# Altium PCB JtagProgCable.PcbDoc (part 2 of 2)
Units mil, origin at the board's own origin, x right, y up, seen from the top; angles counter-clockwise.
Board outline 2330 x 3440 mil, 4 copper layers (Top Layer, MidLayer1, VCC, Bottom Layer); 204 components, 19 nets, 965 pads, 156 vias.
Unrouted connection lines stored in the file: 209.
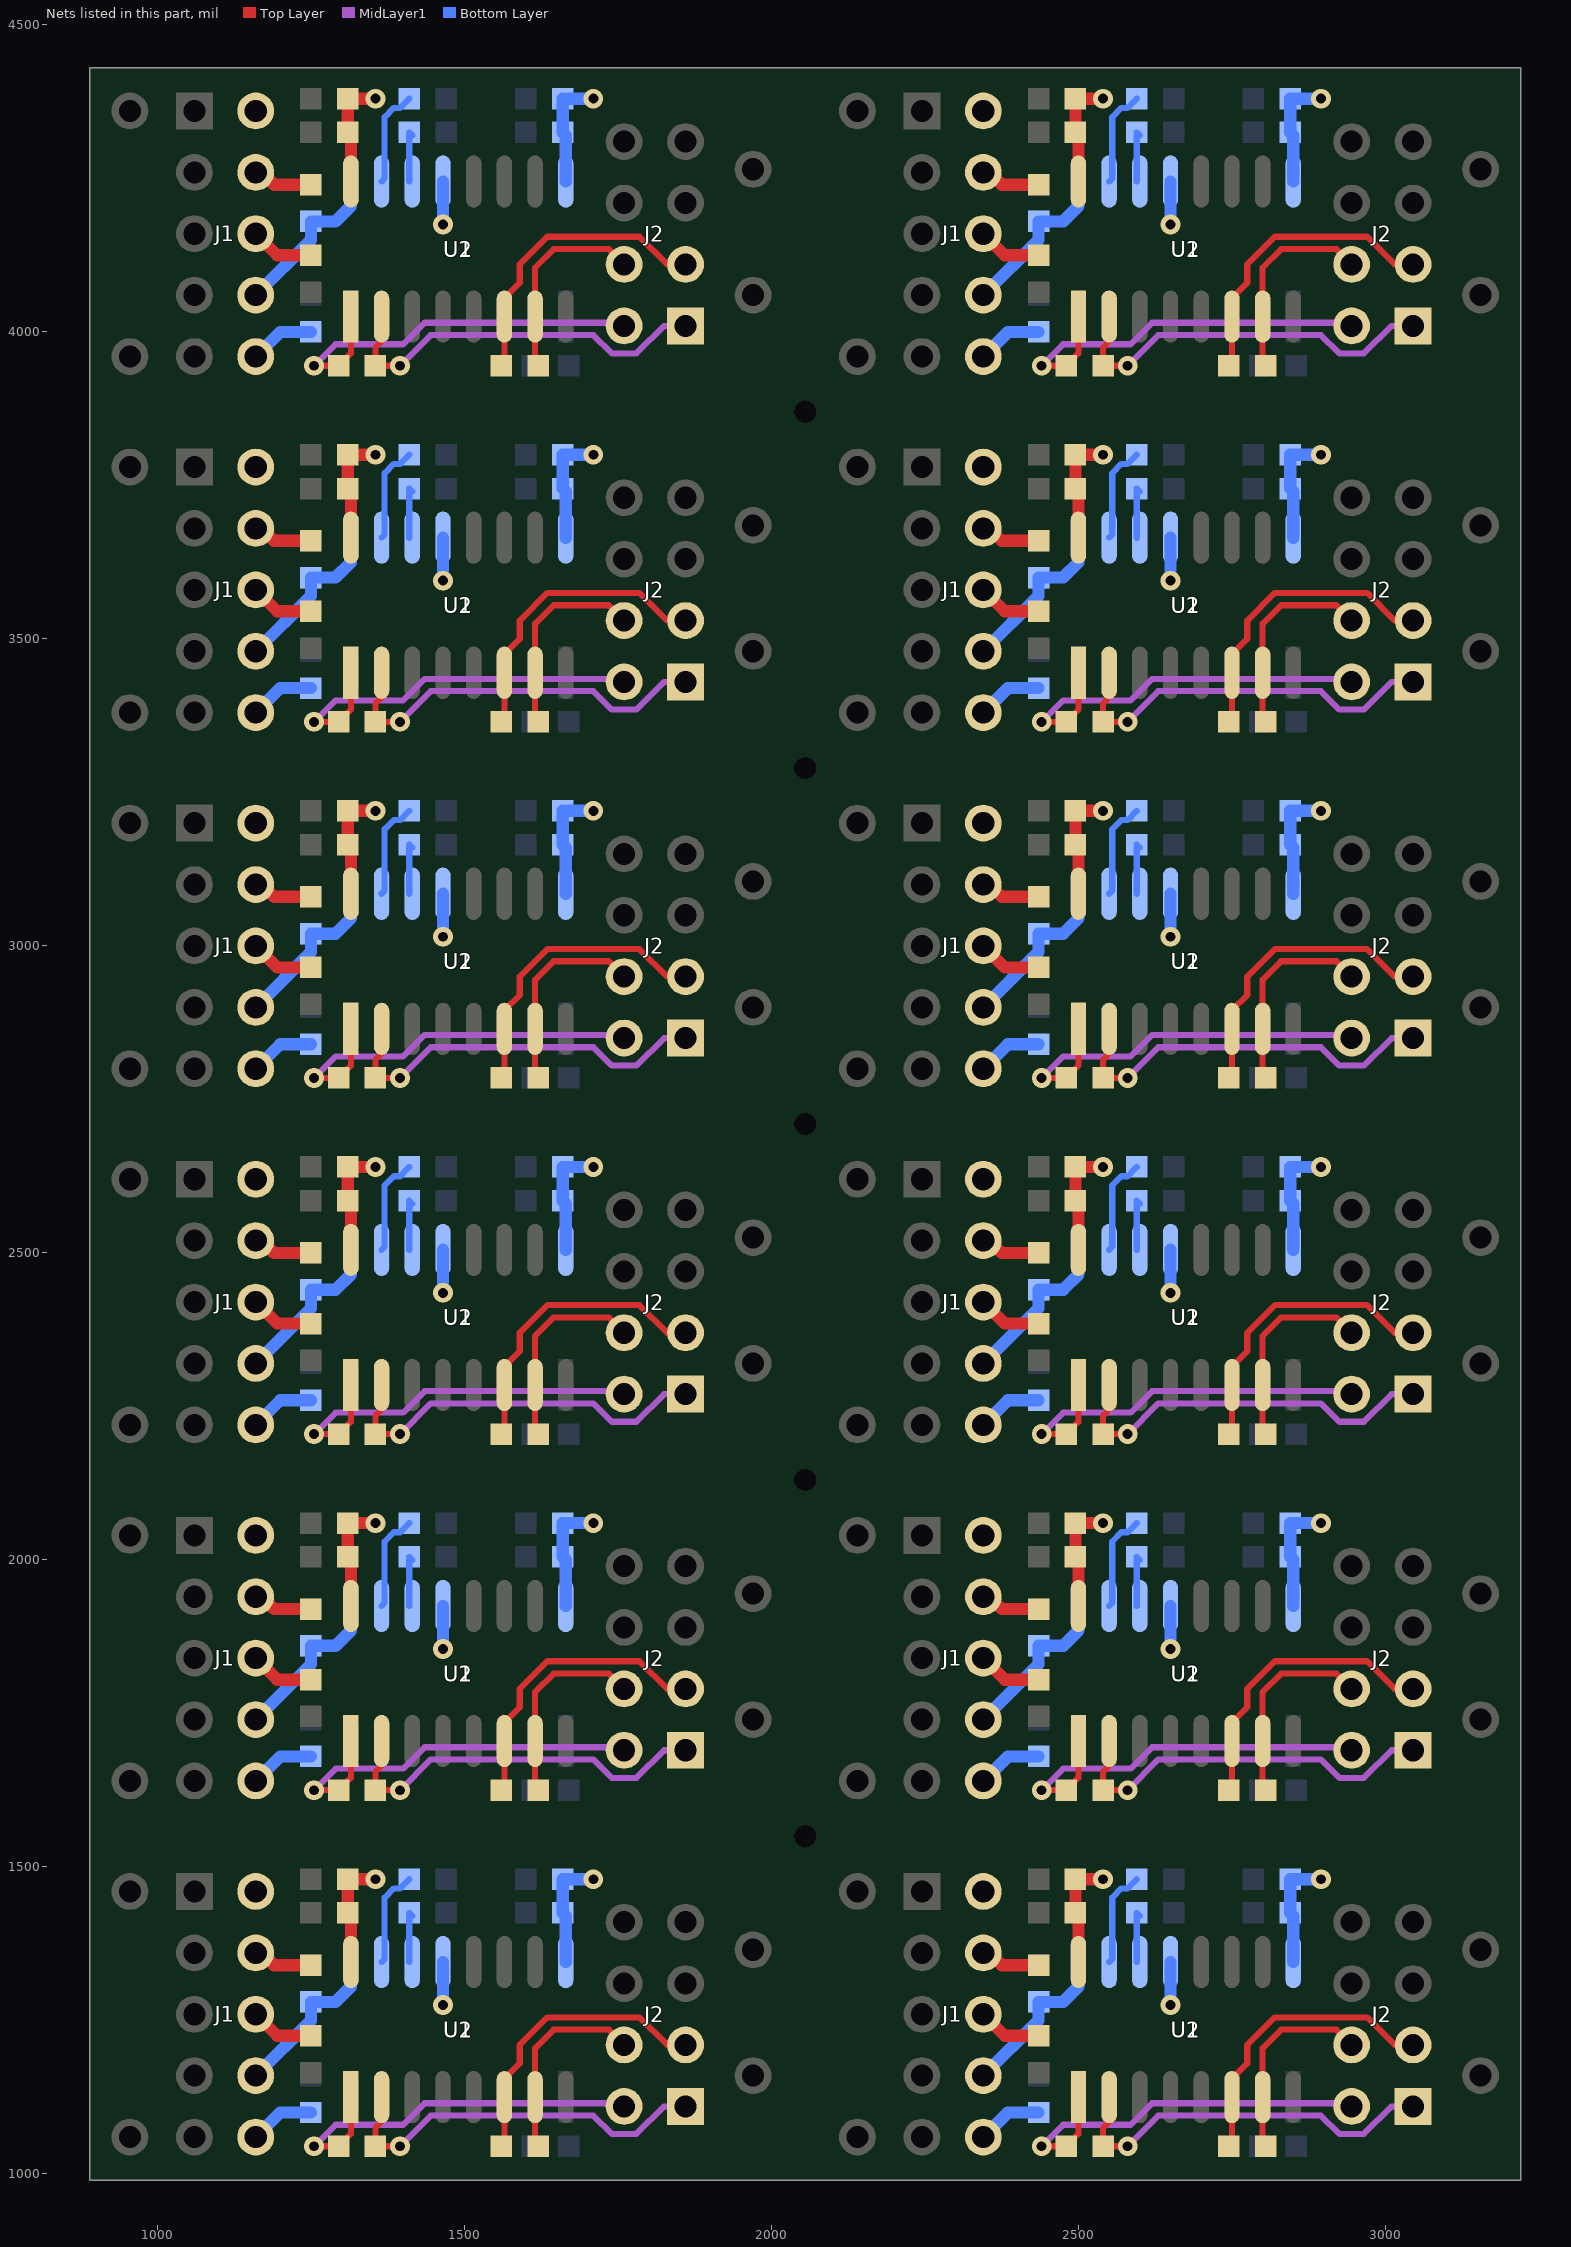
[diagram p4: the nets of this part, all layers, seen from the top]

## Via types
v1: diameter 32, hole 16, Top Layer to Bottom Layer, 156 vias

## Nets (pads, with @x,y where several pads share a name; then routed paths per layer and width w, separated by ;. In a path a pad name is that pad's centre, name@x,y a point inside that pad or via, vN(x,y) a via of type N, cw(c..) or ccw(c..) an arc to the next point about the centre after c; other vN are vias at no path point) (continued)
TDO+: R8.1 U2.10 | length 1914.3
  Bottom Layer w10: U2.10@1364.94,1345 1370,1350.06 1370,1450 1385,1465 1395,1465 R8.1@1410,1480 ; U2.10@1364.94,1925 1370,1930.06 1370,2030 1385,2045 1395,2045 R8.1@1410,2060 ; U2.10@1364.94,2505 1370,2510.06 1370,2610 1385,2625 1395,2625 R8.1@1410,2640 ; U2.10@1364.94,3085 1370,3090.06 1370,3190 1385,3205 1395,3205 R8.1@1410,3220 ; U2.10@1364.94,3665 1370,3670.06 1370,3770 1385,3785 1395,3785 R8.1@1410,3800 ; U2.10@1364.94,4245 1370,4250.06 1370,4350 1385,4365 1395,4365 R8.1@1410,4380 ; U2.10@2549.94,1345 2555,1350.06 2555,1450 2570,1465 2580,1465 R8.1@2595,1480 ; U2.10@2549.94,1925 2555,1930.06 2555,2030 2570,2045 2580,2045 R8.1@2595,2060 ; U2.10@2549.94,2505 2555,2510.06 2555,2610 2570,2625 2580,2625 R8.1@2595,2640 ; U2.10@2549.94,3085 2555,3090.06 2555,3190 2570,3205 2580,3205 R8.1@2595,3220 ; U2.10@2549.94,3665 2555,3670.06 2555,3770 2570,3785 2580,3785 R8.1@2595,3800 ; U2.10@2549.94,4245 2555,4250.06 2555,4350 2570,4365 2580,4365 R8.1@2595,4380
TDO-: R7.1 U2.11 | length 984.5
  Bottom Layer w10: U2.11@1410,1344.94 R7.1@1410,1420 ; R7.1@1410,1425 R7.1@1414.94,1420.06 ; U2.11@1410,1924.94 R7.1@1410,2000 ; R7.1@1410,2005 R7.1@1414.94,2000.06 ; U2.11@1410,2504.94 R7.1@1410,2580 ; R7.1@1410,2585 R7.1@1414.94,2580.06 ; U2.11@1410,3084.94 R7.1@1410,3160 ; R7.1@1410,3165 R7.1@1414.94,3160.06 ; U2.11@1410,3664.94 R7.1@1410,3740 ; R7.1@1410,3745 R7.1@1414.94,3740.06 ; U2.11@1410,4244.94 R7.1@1410,4320 ; R7.1@1410,4325 R7.1@1414.94,4320.06 ; U2.11@2595,1344.94 R7.1@2595,1420 ; R7.1@2595,1425 R7.1@2599.94,1420.06 ; U2.11@2595,1924.94 R7.1@2595,2000 ; R7.1@2595,2005 R7.1@2599.94,2000.06 ; U2.11@2595,2504.94 R7.1@2595,2580 ; R7.1@2595,2585 R7.1@2599.94,2580.06 ; U2.11@2595,3084.94 R7.1@2595,3160 ; R7.1@2595,3165 R7.1@2599.94,3160.06 ; U2.11@2595,3664.94 R7.1@2595,3740 ; R7.1@2595,3745 R7.1@2599.94,3740.06 ; U2.11@2595,4244.94 R7.1@2595,4320 ; R7.1@2595,4325 R7.1@2599.94,4320.06
TMS+: J2.3 R4.1 U1.6 | length 5816.5
  Top Layer w10: R4.1@1560,1045 1565,1050 U1.6@1565,1125 1565,1155 1590,1180 1590,1210 1635,1255 1785,1255 1830,1210 J2.3@1860,1210 ; R4.1@1560,1625 1565,1630 U1.6@1565,1705 1565,1735 1590,1760 1590,1790 1635,1835 1785,1835 1830,1790 J2.3@1860,1790 ; R4.1@1560,2205 1565,2210 U1.6@1565,2285 1565,2315 1590,2340 1590,2370 1635,2415 1785,2415 1830,2370 J2.3@1860,2370 ; R4.1@1560,2785 1565,2790 U1.6@1565,2865 1565,2895 1590,2920 1590,2950 1635,2995 1785,2995 1830,2950 J2.3@1860,2950 ; R4.1@1560,3365 1565,3370 U1.6@1565,3445 1565,3475 1590,3500 1590,3530 1635,3575 1785,3575 1830,3530 J2.3@1860,3530 ; R4.1@1560,3945 1565,3950 U1.6@1565,4025 1565,4055 1590,4080 1590,4110 1635,4155 1785,4155 1830,4110 J2.3@1860,4110 ; R4.1@2745,1045 2750,1050 U1.6@2750,1125 2750,1155 2775,1180 2775,1210 2820,1255 2970,1255 3015,1210 J2.3@3045,1210 ; R4.1@2745,1625 2750,1630 U1.6@2750,1705 2750,1735 2775,1760 2775,1790 2820,1835 2970,1835 3015,1790 J2.3@3045,1790 ; R4.1@2745,2205 2750,2210 U1.6@2750,2285 2750,2315 2775,2340 2775,2370 2820,2415 2970,2415 3015,2370 J2.3@3045,2370 ; R4.1@2745,2785 2750,2790 U1.6@2750,2865 2750,2895 2775,2920 2775,2950 2820,2995 2970,2995 3015,2950 J2.3@3045,2950 ; R4.1@2745,3365 2750,3370 U1.6@2750,3445 2750,3475 2775,3500 2775,3530 2820,3575 2970,3575 3015,3530 J2.3@3045,3530 ; R4.1@2745,3945 2750,3950 U1.6@2750,4025 2750,4055 2775,4080 2775,4110 2820,4155 2970,4155 3015,4110 J2.3@3045,4110
TMS-: J2.4 R4.2 U1.7 | length 3993.4
  Top Layer w10: R4.2@1620,1045 1615,1045 U1.7@1615,1125 1615,1205 1645,1235 1735,1235 J2.4@1760,1210 ; R4.2@1620,1625 1615,1625 U1.7@1615,1705 1615,1785 1645,1815 1735,1815 J2.4@1760,1790 ; R4.2@1620,2205 1615,2205 U1.7@1615,2285 1615,2365 1645,2395 1735,2395 J2.4@1760,2370 ; R4.2@1620,2785 1615,2785 U1.7@1615,2865 1615,2945 1645,2975 1735,2975 J2.4@1760,2950 ; R4.2@1620,3365 1615,3365 U1.7@1615,3445 1615,3525 1645,3555 1735,3555 J2.4@1760,3530 ; R4.2@1620,3945 1615,3945 U1.7@1615,4025 1615,4105 1645,4135 1735,4135 J2.4@1760,4110 ; R4.2@2805,1045 2800,1045 U1.7@2800,1125 2800,1205 2830,1235 2920,1235 J2.4@2945,1210 ; R4.2@2805,1625 2800,1625 U1.7@2800,1705 2800,1785 2830,1815 2920,1815 J2.4@2945,1790 ; R4.2@2805,2205 2800,2205 U1.7@2800,2285 2800,2365 2830,2395 2920,2395 J2.4@2945,2370 ; R4.2@2805,2785 2800,2785 U1.7@2800,2865 2800,2945 2830,2975 2920,2975 J2.4@2945,2950 ; R4.2@2805,3365 2800,3365 U1.7@2800,3445 2800,3525 2830,3555 2920,3555 J2.4@2945,3530 ; R4.2@2805,3945 2800,3945 U1.7@2800,4025 2800,4105 2830,4135 2920,4135 J2.4@2945,4110
TSK+: J2.1 R3.2 U1.2 | length 7691
  Top Layer w10: U1.2@1365,1125 1365,1085 1355,1075 R3.2@1355,1045 v1(1395,1045) ; U1.2@1365,1705 1365,1665 1355,1655 R3.2@1355,1625 v1(1395,1625) ; U1.2@1365,2285 1365,2245 1355,2235 R3.2@1355,2205 v1(1395,2205) ; U1.2@1365,2865 1365,2825 1355,2815 R3.2@1355,2785 v1(1395,2785) ; U1.2@1365,3445 1365,3405 1355,3395 R3.2@1355,3365 v1(1395,3365) ; U1.2@1365,4025 1365,3985 1355,3975 R3.2@1355,3945 v1(1395,3945) ; U1.2@2550,1125 2550,1085 2540,1075 R3.2@2540,1045 v1(2580,1045) ; U1.2@2550,1705 2550,1665 2540,1655 R3.2@2540,1625 v1(2580,1625) ; U1.2@2550,2285 2550,2245 2540,2235 R3.2@2540,2205 v1(2580,2205) ; U1.2@2550,2865 2550,2825 2540,2815 R3.2@2540,2785 v1(2580,2785) ; U1.2@2550,3445 2550,3405 2540,3395 R3.2@2540,3365 v1(2580,3365) ; U1.2@2550,4025 2550,3985 2540,3975 R3.2@2540,3945 v1(2580,3945)
  MidLayer1 w10: v1(1395,1045) 1445,1095 1710,1095 1740,1065 1780,1065 1825,1110 J2.1@1860,1110 ; v1(1395,1625) 1445,1675 1710,1675 1740,1645 1780,1645 1825,1690 J2.1@1860,1690 ; v1(1395,2205) 1445,2255 1710,2255 1740,2225 1780,2225 1825,2270 J2.1@1860,2270 ; v1(1395,2785) 1445,2835 1710,2835 1740,2805 1780,2805 1825,2850 J2.1@1860,2850 ; v1(1395,3365) 1445,3415 1710,3415 1740,3385 1780,3385 1825,3430 J2.1@1860,3430 ; v1(1395,3945) 1445,3995 1710,3995 1740,3965 1780,3965 1825,4010 J2.1@1860,4010 ; v1(2580,1045) 2630,1095 2895,1095 2925,1065 2965,1065 3010,1110 J2.1@3045,1110 ; v1(2580,1625) 2630,1675 2895,1675 2925,1645 2965,1645 3010,1690 J2.1@3045,1690 ; v1(2580,2205) 2630,2255 2895,2255 2925,2225 2965,2225 3010,2270 J2.1@3045,2270 ; v1(2580,2785) 2630,2835 2895,2835 2925,2805 2965,2805 3010,2850 J2.1@3045,2850 ; v1(2580,3365) 2630,3415 2895,3415 2925,3385 2965,3385 3010,3430 J2.1@3045,3430 ; v1(2580,3945) 2630,3995 2895,3995 2925,3965 2965,3965 3010,4010 J2.1@3045,4010
TSK-: J2.2 R3.1 U1.1 | length 7972.2
  Top Layer w10: v1(1255,1045) R3.1@1295,1045 1315,1065 U1.1@1315,1125 ; v1(1255,1625) R3.1@1295,1625 1315,1645 U1.1@1315,1705 ; v1(1255,2205) R3.1@1295,2205 1315,2225 U1.1@1315,2285 ; v1(1255,2785) R3.1@1295,2785 1315,2805 U1.1@1315,2865 ; v1(1255,3365) R3.1@1295,3365 1315,3385 U1.1@1315,3445 ; v1(1255,3945) R3.1@1295,3945 1315,3965 U1.1@1315,4025 ; v1(2440,1045) R3.1@2480,1045 2500,1065 U1.1@2500,1125 ; v1(2440,1625) R3.1@2480,1625 2500,1645 U1.1@2500,1705 ; v1(2440,2205) R3.1@2480,2205 2500,2225 U1.1@2500,2285 ; v1(2440,2785) R3.1@2480,2785 2500,2805 U1.1@2500,2865 ; v1(2440,3365) R3.1@2480,3365 2500,3385 U1.1@2500,3445 ; v1(2440,3945) R3.1@2480,3945 2500,3965 U1.1@2500,4025
  MidLayer1 w10: v1(1255,1045) 1290,1080 1400,1080 1435,1115 1755,1115 J2.2@1760,1110 ; v1(1255,1625) 1290,1660 1400,1660 1435,1695 1755,1695 J2.2@1760,1690 ; v1(1255,2205) 1290,2240 1400,2240 1435,2275 1755,2275 J2.2@1760,2270 ; v1(1255,2785) 1290,2820 1400,2820 1435,2855 1755,2855 J2.2@1760,2850 ; v1(1255,3365) 1290,3400 1400,3400 1435,3435 1755,3435 J2.2@1760,3430 ; v1(1255,3945) 1290,3980 1400,3980 1435,4015 1755,4015 J2.2@1760,4010 ; v1(2440,1045) 2475,1080 2585,1080 2620,1115 2940,1115 J2.2@2945,1110 ; v1(2440,1625) 2475,1660 2585,1660 2620,1695 2940,1695 J2.2@2945,1690 ; v1(2440,2205) 2475,2240 2585,2240 2620,2275 2940,2275 J2.2@2945,2270 ; v1(2440,2785) 2475,2820 2585,2820 2620,2855 2940,2855 J2.2@2945,2850 ; v1(2440,3365) 2475,3400 2585,3400 2620,3435 2940,3435 J2.2@2945,3430 ; v1(2440,3945) 2475,3980 2585,3980 2620,4015 2940,4015 J2.2@2945,4010
TSTTCK: J1.6 R1.2 | length 1254
  Top Layer w20: J1.6@1160,1260 1195,1225 R1.2@1250,1225 ; J1.6@1160,1840 1195,1805 R1.2@1250,1805 ; J1.6@1160,2420 1195,2385 R1.2@1250,2385 ; J1.6@1160,3000 1195,2965 R1.2@1250,2965 ; J1.6@1160,3580 1195,3545 R1.2@1250,3545 ; J1.6@1160,4160 1195,4125 R1.2@1250,4125 ; J1.6@2345,1260 2380,1225 R1.2@2435,1225 ; J1.6@2345,1840 2380,1805 R1.2@2435,1805 ; J1.6@2345,2420 2380,2385 R1.2@2435,2385 ; J1.6@2345,3000 2380,2965 R1.2@2435,2965 ; J1.6@2345,3580 2380,3545 R1.2@2435,3545 ; J1.6@2345,4160 2380,4125 R1.2@2435,4125
TSTTDI: J1.10 R6.2 | length 1278.8
  Bottom Layer w20: J1.10@1160,1060 1200,1100 R6.2@1250,1100 ; J1.10@1160,1640 1200,1680 R6.2@1250,1680 ; J1.10@1160,2220 1200,2260 R6.2@1250,2260 ; J1.10@1160,2800 1200,2840 R6.2@1250,2840 ; J1.10@1160,3380 1200,3420 R6.2@1250,3420 ; J1.10@1160,3960 1200,4000 R6.2@1250,4000 ; J1.10@2345,1060 2385,1100 R6.2@2435,1100 ; J1.10@2345,1640 2385,1680 R6.2@2435,1680 ; J1.10@2345,2220 2385,2260 R6.2@2435,2260 ; J1.10@2345,2800 2385,2840 R6.2@2435,2840 ; J1.10@2345,3380 2385,3420 R6.2@2435,3420 ; J1.10@2345,3960 2385,4000 R6.2@2435,4000
TSTTDO: J1.8 R9.1 U2.9 | length 3271.9
  Bottom Layer w20: J1.8@1160,1160 1250,1250 R9.1@1250,1280 1290,1280 1315,1305 1314.94,1305.06 U2.9@1314.94,1345 ; J1.8@1160,1740 1250,1830 R9.1@1250,1860 1290,1860 1315,1885 1314.94,1885.06 U2.9@1314.94,1925 ; J1.8@1160,2320 1250,2410 R9.1@1250,2440 1290,2440 1315,2465 1314.94,2465.06 U2.9@1314.94,2505 ; J1.8@1160,2900 1250,2990 R9.1@1250,3020 1290,3020 1315,3045 1314.94,3045.06 U2.9@1314.94,3085 ; J1.8@1160,3480 1250,3570 R9.1@1250,3600 1290,3600 1315,3625 1314.94,3625.06 U2.9@1314.94,3665 ; J1.8@1160,4060 1250,4150 R9.1@1250,4180 1290,4180 1315,4205 1314.94,4205.06 U2.9@1314.94,4245 ; J1.8@2345,1160 2435,1250 R9.1@2435,1280 2475,1280 2500,1305 2499.94,1305.06 U2.9@2499.94,1345 ; J1.8@2345,1740 2435,1830 R9.1@2435,1860 2475,1860 2500,1885 2499.94,1885.06 U2.9@2499.94,1925 ; J1.8@2345,2320 2435,2410 R9.1@2435,2440 2475,2440 2500,2465 2499.94,2465.06 U2.9@2499.94,2505 ; J1.8@2345,2900 2435,2990 R9.1@2435,3020 2475,3020 2500,3045 2499.94,3045.06 U2.9@2499.94,3085 ; J1.8@2345,3480 2435,3570 R9.1@2435,3600 2475,3600 2500,3625 2499.94,3625.06 U2.9@2499.94,3665 ; J1.8@2345,4060 2435,4150 R9.1@2435,4180 2475,4180 2500,4205 2499.94,4205.06 U2.9@2499.94,4245
TSTTMS: J1.4 R2.2 | length 1179.4
  Top Layer w20: J1.4@1160,1360 1170,1360 1190,1340 R2.2@1250,1340 ; J1.4@1160,1940 1170,1940 1190,1920 R2.2@1250,1920 ; J1.4@1160,2520 1170,2520 1190,2500 R2.2@1250,2500 ; J1.4@1160,3100 1170,3100 1190,3080 R2.2@1250,3080 ; J1.4@1160,3680 1170,3680 1190,3660 R2.2@1250,3660 ; J1.4@1160,4260 1170,4260 1190,4240 R2.2@1250,4240 ; J1.4@2345,1360 2355,1360 2375,1340 R2.2@2435,1340 ; J1.4@2345,1940 2355,1940 2375,1920 R2.2@2435,1920 ; J1.4@2345,2520 2355,2520 2375,2500 R2.2@2435,2500 ; J1.4@2345,3100 2355,3100 2375,3080 R2.2@2435,3080 ; J1.4@2345,3680 2355,3680 2375,3660 R2.2@2435,3660 ; J1.4@2345,4260 2355,4260 2375,4240 R2.2@2435,4240
VCC: C1.2 C2.2 C3.2 C4.2 J1.2 U1.16 U2.12 U2.16 | length 5354.2
  Top Layer w10: C1.2@1310,1425 C1.2@1315,1420 ; C1.2@1310,2005 C1.2@1315,2000 ; C1.2@1310,2585 C1.2@1315,2580 ; C1.2@1310,3165 C1.2@1315,3160 ; C1.2@1310,3745 C1.2@1315,3740 ; C1.2@1310,4325 C1.2@1315,4320 ; C1.2@2495,1425 C1.2@2500,1420 ; C1.2@2495,2005 C1.2@2500,2000 ; C1.2@2495,2585 C1.2@2500,2580 ; C1.2@2495,3165 C1.2@2500,3160 ; C1.2@2495,3745 C1.2@2500,3740 ; C1.2@2495,4325 C1.2@2500,4320
  Top Layer w20: U1.16@1315,1345 1315,1420 C1.2@1310,1425 C2.2@1310,1480 v1(1355,1480) ; U1.16@1315,1925 1315,2000 C1.2@1310,2005 C2.2@1310,2060 v1(1355,2060) ; U1.16@1315,2505 1315,2580 C1.2@1310,2585 C2.2@1310,2640 v1(1355,2640) ; U1.16@1315,3085 1315,3160 C1.2@1310,3165 C2.2@1310,3220 v1(1355,3220) ; U1.16@1315,3665 1315,3740 C1.2@1310,3745 C2.2@1310,3800 v1(1355,3800) ; U1.16@1315,4245 1315,4320 C1.2@1310,4325 C2.2@1310,4380 v1(1355,4380) ; U1.16@2500,1345 2500,1420 C1.2@2495,1425 C2.2@2495,1480 v1(2540,1480) ; U1.16@2500,1925 2500,2000 C1.2@2495,2005 C2.2@2495,2060 v1(2540,2060) ; U1.16@2500,2505 2500,2580 C1.2@2495,2585 C2.2@2495,2640 v1(2540,2640) ; U1.16@2500,3085 2500,3160 C1.2@2495,3165 C2.2@2495,3220 v1(2540,3220) ; U1.16@2500,3665 2500,3740 C1.2@2495,3745 C2.2@2495,3800 v1(2540,3800) ; U1.16@2500,4245 2500,4320 C1.2@2495,4325 C2.2@2495,4380 v1(2540,4380)
  Bottom Layer w20: v1(1465,1275) U2.12@1465,1345 ; v1(1465,1855) U2.12@1465,1925 ; v1(1465,2435) U2.12@1465,2505 ; v1(1465,3015) U2.12@1465,3085 ; v1(1465,3595) U2.12@1465,3665 ; v1(1465,4175) U2.12@1465,4245 ; U2.16@1664.94,1345 1664.94,1420.06 C3.2@1660,1425 C4.2@1660,1480 v1(1710,1480) ; U2.16@1664.94,1925 1664.94,2000.06 C3.2@1660,2005 C4.2@1660,2060 v1(1710,2060) ; U2.16@1664.94,2505 1664.94,2580.06 C3.2@1660,2585 C4.2@1660,2640 v1(1710,2640) ; U2.16@1664.94,3085 1664.94,3160.06 C3.2@1660,3165 C4.2@1660,3220 v1(1710,3220) ; U2.16@1664.94,3665 1664.94,3740.06 C3.2@1660,3745 C4.2@1660,3800 v1(1710,3800) ; U2.16@1664.94,4245 1664.94,4320.06 C3.2@1660,4325 C4.2@1660,4380 v1(1710,4380) ; v1(2650,1275) U2.12@2650,1345 ; v1(2650,1855) U2.12@2650,1925 ; v1(2650,2435) U2.12@2650,2505 ; v1(2650,3015) U2.12@2650,3085 ; v1(2650,3595) U2.12@2650,3665 ; v1(2650,4175) U2.12@2650,4245 ; U2.16@2849.94,1345 2849.94,1420.06 C3.2@2845,1425 C4.2@2845,1480 v1(2895,1480) ; U2.16@2849.94,1925 2849.94,2000.06 C3.2@2845,2005 C4.2@2845,2060 v1(2895,2060) ; U2.16@2849.94,2505 2849.94,2580.06 C3.2@2845,2585 C4.2@2845,2640 v1(2895,2640) ; U2.16@2849.94,3085 2849.94,3160.06 C3.2@2845,3165 C4.2@2845,3220 v1(2895,3220) ; U2.16@2849.94,3665 2849.94,3740.06 C3.2@2845,3745 C4.2@2845,3800 v1(2895,3800) ; U2.16@2849.94,4245 2849.94,4320.06 C3.2@2845,4325 C4.2@2845,4380 v1(2895,4380)
pads on no net: U1.9 U1.10 U1.11 U1.13 U1.14 U1.15 U2.5 U2.6 U2.7 U2.13 U2.14 U2.15

## Polygon pours and split planes (outlines as drawn)
GND on MidLayer1 "Mechanical 1-No Net" (hatched 90Degree grid 6 track 8, remove dead copper, pour order 1000): 920,1500 2005,1500 2005,1020 920,1020 920,1500
GND on MidLayer1 "Mechanical 1-No Net" (hatched 90Degree grid 6 track 8, remove dead copper, pour order 1000): 2105,1500 3190,1500 3190,1020 2105,1020 2105,1500
GND on MidLayer1 "Mechanical 1-No Net" (hatched 90Degree grid 6 track 8, remove dead copper, pour order 1000): 2105,2080 3190,2080 3190,1600 2105,1600 2105,2080
GND on MidLayer1 "Mechanical 1-No Net" (hatched 90Degree grid 6 track 8, remove dead copper, pour order 1000): 2105,2660 3190,2660 3190,2180 2105,2180 2105,2660
GND on MidLayer1 "Mechanical 1-No Net" (hatched 90Degree grid 6 track 8, remove dead copper, pour order 1000): 2105,3240 3190,3240 3190,2760 2105,2760 2105,3240
GND on MidLayer1 "Mechanical 1-No Net" (hatched 90Degree grid 6 track 8, remove dead copper, pour order 1000): 2105,3820 3190,3820 3190,3340 2105,3340 2105,3820
GND on MidLayer1 "Mechanical 1-No Net" (hatched 90Degree grid 6 track 8, remove dead copper, pour order 1000): 2105,4400 3190,4400 3190,3920 2105,3920 2105,4400
GND on MidLayer1 "Mechanical 1-No Net" (hatched 90Degree grid 6 track 8, remove dead copper, pour order 1000): 920,2080 2005,2080 2005,1600 920,1600 920,2080
GND on MidLayer1 "Mechanical 1-No Net" (hatched 90Degree grid 6 track 8, remove dead copper, pour order 1000): 920,2660 2005,2660 2005,2180 920,2180 920,2660
GND on MidLayer1 "Mechanical 1-No Net" (hatched 90Degree grid 6 track 8, remove dead copper, pour order 1000): 920,3240 2005,3240 2005,2760 920,2760 920,3240
GND on MidLayer1 "Mechanical 1-No Net" (hatched 90Degree grid 6 track 8, remove dead copper, pour order 1000): 920,3820 2005,3820 2005,3340 920,3340 920,3820
GND on MidLayer1 "Mechanical 1-No Net" (hatched 90Degree grid 6 track 8, remove dead copper, pour order 1000): 920,4400 2005,4400 2005,3920 920,3920 920,4400
VCC on VCC (split plane): 3199.9,3330.1 2095.1,3330.1 2095.1,3829.9 3199.9,3829.9
VCC on VCC (split plane): 3199.9,2170.1 2095.1,2170.1 2095.1,2669.9 3199.9,2669.9
VCC on VCC (split plane): 2014.9,2170.1 910.1,2170.1 910.1,2669.9 2014.9,2669.9
VCC on VCC (split plane): 2014.9,3330.1 910.1,3330.1 910.1,3829.9 2014.9,3829.9
VCC on VCC (split plane): 3199.9,2750.1 2095.1,2750.1 2095.1,3249.9 3199.9,3249.9
VCC on VCC (split plane): 2014.9,2750.1 910.1,2750.1 910.1,3249.9 2014.9,3249.9
VCC on VCC (split plane): 3199.9,3910.1 2095.1,3910.1 2095.1,4409.9 3199.9,4409.9
VCC on VCC (split plane): 3199.9,1010.1 2095.1,1010.1 2095.1,1509.9 3199.9,1509.9
VCC on VCC (split plane): 2014.9,1010.1 910.1,1010.1 910.1,1509.9 2014.9,1509.9
VCC on VCC (split plane): 2014.9,3910.1 910.1,3910.1 910.1,4409.9 2014.9,4409.9
VCC on VCC (split plane): 3199.9,1590.1 2095.1,1590.1 2095.1,2089.9 3199.9,2089.9
VCC on VCC (split plane): 2014.9,1590.1 910.1,1590.1 910.1,2089.9 2014.9,2089.9
VCC on VCC (split plane): 2055.29,1566.08 2056.43,1562.31 2058.29,1558.83 2060.79,1555.79 2063.83,1553.29 2067.31,1551.43 2071.08,1550.29 2074.02,1550 2071.08,1549.71 2067.31,1548.57 2063.83,1546.71 2060.79,1544.21 2058.29,1541.17 2056.43,1537.69 2055.29,1533.92 2055,1530.98 2054.71,1533.92 2053.57,1537.69 2051.71,1541.17 2049.21,1544.21 2046.17,1546.71 2042.69,1548.57 2038.92,1549.71 2035.98,1550 2038.92,1550.29 2042.69,1551.43 2046.17,1553.29 2049.21,1555.79 2051.71,1558.83 2053.57,1562.31 2054.71,1566.08 2055,1569.02
VCC on VCC (split plane): 2055.29,2146.08 2056.43,2142.31 2058.29,2138.83 2060.79,2135.79 2063.83,2133.29 2067.31,2131.43 2071.08,2130.29 2074.02,2130 2071.08,2129.71 2067.31,2128.57 2063.83,2126.71 2060.79,2124.21 2058.29,2121.17 2056.43,2117.69 2055.29,2113.92 2055,2110.98 2054.71,2113.92 2053.57,2117.69 2051.71,2121.17 2049.21,2124.21 2046.17,2126.71 2042.69,2128.57 2038.92,2129.71 2035.98,2130 2038.92,2130.29 2042.69,2131.43 2046.17,2133.29 2049.21,2135.79 2051.71,2138.83 2053.57,2142.31 2054.71,2146.08 2055,2149.02
VCC on VCC (split plane): 2055.29,3306.08 2056.43,3302.31 2058.29,3298.83 2060.79,3295.79 2063.83,3293.29 2067.31,3291.43 2071.08,3290.29 2074.02,3290 2071.08,3289.71 2067.31,3288.57 2063.83,3286.71 2060.79,3284.21 2058.29,3281.17 2056.43,3277.69 2055.29,3273.92 2055,3270.98 2054.71,3273.92 2053.57,3277.69 2051.71,3281.17 2049.21,3284.21 2046.17,3286.71 2042.69,3288.57 2038.92,3289.71 2035.98,3290 2038.92,3290.29 2042.69,3291.43 2046.17,3293.29 2049.21,3295.79 2051.71,3298.83 2053.57,3302.31 2054.71,3306.08 2055,3309.02
VCC on VCC (split plane): 2055.29,2726.08 2056.43,2722.31 2058.29,2718.83 2060.79,2715.79 2063.83,2713.29 2067.31,2711.43 2071.08,2710.29 2074.02,2710 2071.08,2709.71 2067.31,2708.57 2063.83,2706.71 2060.79,2704.21 2058.29,2701.17 2056.43,2697.69 2055.29,2693.92 2055,2690.98 2054.71,2693.92 2053.57,2697.69 2051.71,2701.17 2049.21,2704.21 2046.17,2706.71 2042.69,2708.57 2038.92,2709.71 2035.98,2710 2038.92,2710.29 2042.69,2711.43 2046.17,2713.29 2049.21,2715.79 2051.71,2718.83 2053.57,2722.31 2054.71,2726.08 2055,2729.02
VCC on VCC (split plane): 2055.29,3886.08 2056.43,3882.31 2058.29,3878.83 2060.79,3875.79 2063.83,3873.29 2067.31,3871.43 2071.08,3870.29 2074.02,3870 2071.08,3869.71 2067.31,3868.57 2063.83,3866.71 2060.79,3864.21 2058.29,3861.17 2056.43,3857.69 2055.29,3853.92 2055,3850.98 2054.71,3853.92 2053.57,3857.69 2051.71,3861.17 2049.21,3864.21 2046.17,3866.71 2042.69,3868.57 2038.92,3869.71 2035.98,3870 2038.92,3870.29 2042.69,3871.43 2046.17,3873.29 2049.21,3875.79 2051.71,3878.83 2053.57,3882.31 2054.71,3886.08 2055,3889.02

## Other copper
MidLayer1:
  text "GND" at 1270,4165 h40
  text "GND" at 2455,4165 h40
  text "GND" at 1270,3585 h40
  text "GND" at 2455,3585 h40
  text "GND" at 1270,3005 h40
  text "GND" at 2455,3005 h40
  text "GND" at 1270,2425 h40
  text "GND" at 2455,2425 h40
  text "GND" at 1270,1845 h40
  text "GND" at 2455,1845 h40
  text "GND" at 1270,1265 h40
  text "GND" at 2455,1265 h40
VCC (plane layer: these items are gaps in the copper):
  lines w40: 890,990 2035,990 2035,1530 890,1530 890,990 ; 890,1570 890,2110 2035,2110 2035,1570 890,1570 ; 890,2150 2035,2150 2035,2690 890,2690 890,2150 ; 890,2730 890,3270 2035,3270 2035,2730 890,2730 ; 890,3310 890,3850 2035,3850 2035,3310 890,3310 ; 890,3890 890,4430 2035,4430 2035,3890 890,3890 ; 2075,990 2075,1530 3220,1530 3220,990 2075,990 ; 2075,1570 2075,2110 3220,2110 3220,1570 2075,1570 ; 2075,2150 2075,2690 3220,2690 3220,2150 2075,2150 ; 2075,2730 2075,3270 3220,3270 3220,2730 2075,2730 ; 2075,3310 2075,3850 3220,3850 3220,3310 2075,3310 ; 2075,3890 2075,4430 3220,4430 3220,3890 2075,3890
  text "VCC" at 1530,4220 h40
  text "VCC" at 2715,4220 h40
  text "VCC" at 1530,3640 h40
  text "VCC" at 2715,3640 h40
  text "VCC" at 1530,3060 h40
  text "VCC" at 2715,3060 h40
  text "VCC" at 1530,2480 h40
  text "VCC" at 2715,2480 h40
  text "VCC" at 1530,1900 h40
  text "VCC" at 2715,1900 h40
  text "VCC" at 1530,1320 h40
  text "VCC" at 2715,1320 h40

## Silkscreen, mask and mechanical layers (free items; w line width, h text height)
Top Overlay:
  lines w10: 910,1550 3200,1550 ; 910,2130 3200,2130 ; 910,2710 3200,2710 ; 910,3290 3200,3290 ; 910,3870 3195,3870 3200,3870 ; 1970,1205 1970,1320 ; 1970,1785 1970,1900 ; 1970,2365 1970,2480 ; 1970,2945 1970,3060 ; 1970,3525 1970,3640 ; 1970,4105 1970,4220 ; 2055,1010 2055,4410 ; 3155,1205 3155,1320 ; 3155,1785 3155,1900 ; 3155,2365 3155,2480 ; 3155,2945 3155,3060 ; 3155,3525 3155,3640 ; 3155,4105 3155,4220
  text "+" at 1855,4375 h20
  text "+" at 3040,4375 h20
  text "-" at 1755,4370 h20
  text "-" at 2940,4370 h20
  text "Matt.Dobbs" at 970,4315 h20 r270
  text "Matt.Dobbs" at 2155,4315 h20 r270
  text "TDO" at 1940,4285 h20 r90
  text "TDO" at 3125,4285 h20 r90
  text "TDI" at 1940,4185 h20 r90
  text "TDI" at 3125,4185 h20 r90
  text "@McGill.ca" at 930,4180 h20 r270
  text "@McGill.ca" at 2115,4180 h20 r270
  text "GND" at 2005,4135 h20 r90
  text "GND" at 3190,4135 h20 r90
  text "TMS" at 1940,4085 h20 r90
  text "TMS" at 3125,4085 h20 r90
  text "TSK" at 1940,3980 h20 r90
  text "TSK" at 3125,3980 h20 r90
  text "JTAG-LVDS" at 1725,3930 h20
  text "JTAG-LVDS" at 2910,3930 h20
  text "TOP" at 1950,3925 h20
  text "TOP" at 3135,3925 h20
  text "+" at 1855,3795 h20
  text "+" at 3040,3795 h20
  text "-" at 1755,3790 h20
  text "-" at 2940,3790 h20
  text "Matt.Dobbs" at 970,3735 h20 r270
  text "Matt.Dobbs" at 2155,3735 h20 r270
  text "TDO" at 1940,3705 h20 r90
  text "TDO" at 3125,3705 h20 r90
  text "TDI" at 1940,3605 h20 r90
  text "TDI" at 3125,3605 h20 r90
  text "@McGill.ca" at 930,3600 h20 r270
  text "@McGill.ca" at 2115,3600 h20 r270
  text "GND" at 2005,3555 h20 r90
  text "GND" at 3190,3555 h20 r90
  text "TMS" at 1940,3505 h20 r90
  text "TMS" at 3125,3505 h20 r90
  text "TSK" at 1940,3400 h20 r90
  text "TSK" at 3125,3400 h20 r90
  text "JTAG-LVDS" at 1725,3350 h20
  text "JTAG-LVDS" at 2910,3350 h20
  text "TOP" at 1950,3345 h20
  text "TOP" at 3135,3345 h20
  text "+" at 1855,3215 h20
  text "+" at 3040,3215 h20
  text "-" at 1755,3210 h20
  text "-" at 2940,3210 h20
  text "Matt.Dobbs" at 970,3155 h20 r270
  text "Matt.Dobbs" at 2155,3155 h20 r270
  text "TDO" at 1940,3125 h20 r90
  text "TDO" at 3125,3125 h20 r90
  text "TDI" at 1940,3025 h20 r90
  text "TDI" at 3125,3025 h20 r90
  text "@McGill.ca" at 930,3020 h20 r270
  text "@McGill.ca" at 2115,3020 h20 r270
  text "GND" at 2005,2975 h20 r90
  text "GND" at 3190,2975 h20 r90
  text "TMS" at 1940,2925 h20 r90
  text "TMS" at 3125,2925 h20 r90
  text "TSK" at 1940,2820 h20 r90
  text "TSK" at 3125,2820 h20 r90
  text "JTAG-LVDS" at 1725,2770 h20
  text "JTAG-LVDS" at 2910,2770 h20
  text "TOP" at 1950,2765 h20
  text "TOP" at 3135,2765 h20
  text "+" at 1855,2635 h20
  text "+" at 3040,2635 h20
  text "-" at 1755,2630 h20
  text "-" at 2940,2630 h20
  text "Matt.Dobbs" at 970,2575 h20 r270
  text "Matt.Dobbs" at 2155,2575 h20 r270
  text "TDO" at 1940,2545 h20 r90
  text "TDO" at 3125,2545 h20 r90
  text "TDI" at 1940,2445 h20 r90
  text "TDI" at 3125,2445 h20 r90
  text "@McGill.ca" at 930,2440 h20 r270
  text "@McGill.ca" at 2115,2440 h20 r270
  text "GND" at 2005,2395 h20 r90
  text "GND" at 3190,2395 h20 r90
  text "TMS" at 1940,2345 h20 r90
  text "TMS" at 3125,2345 h20 r90
  text "TSK" at 1940,2240 h20 r90
  text "TSK" at 3125,2240 h20 r90
  text "JTAG-LVDS" at 1725,2190 h20
  text "JTAG-LVDS" at 2910,2190 h20
  text "TOP" at 1950,2185 h20
  text "TOP" at 3135,2185 h20
  text "+" at 1855,2055 h20
  text "+" at 3040,2055 h20
  text "-" at 1755,2050 h20
  text "-" at 2940,2050 h20
  text "Matt.Dobbs" at 970,1995 h20 r270
  text "Matt.Dobbs" at 2155,1995 h20 r270
  text "TDO" at 1940,1965 h20 r90
  text "TDO" at 3125,1965 h20 r90
  text "TDI" at 1940,1865 h20 r90
  text "TDI" at 3125,1865 h20 r90
  text "@McGill.ca" at 930,1860 h20 r270
  text "@McGill.ca" at 2115,1860 h20 r270
  text "GND" at 2005,1815 h20 r90
  text "GND" at 3190,1815 h20 r90
  text "TMS" at 1940,1765 h20 r90
  text "TMS" at 3125,1765 h20 r90
  text "TSK" at 1940,1660 h20 r90
  text "TSK" at 3125,1660 h20 r90
  text "JTAG-LVDS" at 1725,1610 h20
  text "JTAG-LVDS" at 2910,1610 h20
  text "TOP" at 1950,1605 h20
  text "TOP" at 3135,1605 h20
  text "+" at 1855,1475 h20
  text "+" at 3040,1475 h20
  text "-" at 1755,1470 h20
  text "-" at 2940,1470 h20
  text "Matt.Dobbs" at 970,1415 h20 r270
  text "Matt.Dobbs" at 2155,1415 h20 r270
  text "TDO" at 1940,1385 h20 r90
  text "TDO" at 3125,1385 h20 r90
  text "TDI" at 1940,1285 h20 r90
  text "TDI" at 3125,1285 h20 r90
  text "@McGill.ca" at 930,1280 h20 r270
  text "@McGill.ca" at 2115,1280 h20 r270
  text "GND" at 2005,1235 h20 r90
  text "GND" at 3190,1235 h20 r90
  text "TMS" at 1940,1185 h20 r90
  text "TMS" at 3125,1185 h20 r90
  text "TSK" at 1940,1080 h20 r90
  text "TSK" at 3125,1080 h20 r90
  text "JTAG-LVDS" at 1725,1030 h20
  text "JTAG-LVDS" at 2910,1030 h20
  text "TOP" at 1950,1025 h20
  text "TOP" at 3135,1025 h20
Bottom Overlay:
  lines w10: 1000,1060 1015,1060 ; 1000,1460 1015,1460 ; 1000,1640 1015,1640 ; 1000,2040 1015,2040 ; 1000,2220 1015,2220 ; 1000,2620 1015,2620 ; 1000,2800 1015,2800 ; 1000,3200 1015,3200 ; 1000,3380 1015,3380 ; 1000,3780 1015,3780 ; 1000,3960 1015,3960 ; 1000,4360 1015,4360 ; 1060,1105 1060,1115 ; 1060,1205 1060,1215 ; 1060,1305 1060,1315 ; 1060,1405 1060,1415 ; 1060,1685 1060,1695 ; 1060,1785 1060,1795 ; 1060,1885 1060,1895 ; 1060,1985 1060,1995 ; 1060,2265 1060,2275 ; 1060,2365 1060,2375 ; 1060,2465 1060,2475 ; 1060,2565 1060,2575 ; 1060,2845 1060,2855 ; 1060,2945 1060,2955 ; 1060,3045 1060,3055 ; 1060,3145 1060,3155 ; 1060,3425 1060,3435 ; 1060,3525 1060,3535 ; 1060,3625 1060,3635 ; 1060,3725 1060,3735 ; 1060,4005 1060,4015 ; 1060,4105 1060,4115 ; 1060,4205 1060,4215 ; 1060,4305 1060,4315 ; 2185,1060 2200,1060 ; 2185,1460 2200,1460 ; 2185,1640 2200,1640 ; 2185,2040 2200,2040 ; 2185,2220 2200,2220 ; 2185,2620 2200,2620 ; 2185,2800 2200,2800 ; 2185,3200 2200,3200 ; 2185,3380 2200,3380 ; 2185,3780 2200,3780 ; 2185,3960 2200,3960 ; 2185,4360 2200,4360 ; 2245,1105 2245,1115 ; 2245,1205 2245,1215 ; 2245,1305 2245,1315 ; 2245,1405 2245,1415 ; 2245,1685 2245,1695 ; 2245,1785 2245,1795 ; 2245,1885 2245,1895 ; 2245,1985 2245,1995 ; 2245,2265 2245,2275 ; 2245,2365 2245,2375 ; 2245,2465 2245,2475 ; 2245,2565 2245,2575 ; 2245,2845 2245,2855 ; 2245,2945 2245,2955 ; 2245,3045 2245,3055 ; 2245,3145 2245,3155 ; 2245,3425 2245,3435 ; 2245,3525 2245,3535 ; 2245,3625 2245,3635 ; 2245,3725 2245,3735 ; 2245,4005 2245,4015 ; 2245,4105 2245,4115 ; 2245,4205 2245,4215 ; 2245,4305 2245,4315
  text "VCC" at 1250,4380 h20
  text "VCC" at 2435,4380 h20
  text "GND" at 1010,4330 h20 r90
  text "GND" at 2195,4330 h20 r90
  text "BOT" at 2000,3925 h20
  text "BOT" at 3185,3925 h20
  text "VCC" at 1250,3800 h20
  text "VCC" at 2435,3800 h20
  text "GND" at 1010,3750 h20 r90
  text "GND" at 2195,3750 h20 r90
  text "BOT" at 2000,3345 h20
  text "BOT" at 3185,3345 h20
  text "VCC" at 1250,3220 h20
  text "VCC" at 2435,3220 h20
  text "GND" at 1010,3170 h20 r90
  text "GND" at 2195,3170 h20 r90
  text "BOT" at 2000,2765 h20
  text "BOT" at 3185,2765 h20
  text "VCC" at 1250,2640 h20
  text "VCC" at 2435,2640 h20
  text "GND" at 1010,2590 h20 r90
  text "GND" at 2195,2590 h20 r90
  text "BOT" at 2000,2185 h20
  text "BOT" at 3185,2185 h20
  text "VCC" at 1250,2060 h20
  text "VCC" at 2435,2060 h20
  text "GND" at 1010,2010 h20 r90
  text "GND" at 2195,2010 h20 r90
  text "BOT" at 2000,1605 h20
  text "BOT" at 3185,1605 h20
  text "VCC" at 1250,1480 h20
  text "VCC" at 2435,1480 h20
  text "GND" at 1010,1430 h20 r90
  text "GND" at 2195,1430 h20 r90
  text "BOT" at 2000,1025 h20
  text "BOT" at 3185,1025 h20
Mechanical 1:
  the board outline again, w40